# Altium PCB debug.PCBDOC
Units mil, origin at the board's own origin, x right, y up, seen from the top; angles counter-clockwise.
Board outline 3000 x 3000 mil, 4 copper layers (Top Layer, InternalPlane1, Mid-Layer 2, Bottom Layer); 4 components, 52 nets, 130 pads, 2 vias.
Unrouted connection lines stored in the file: 1.
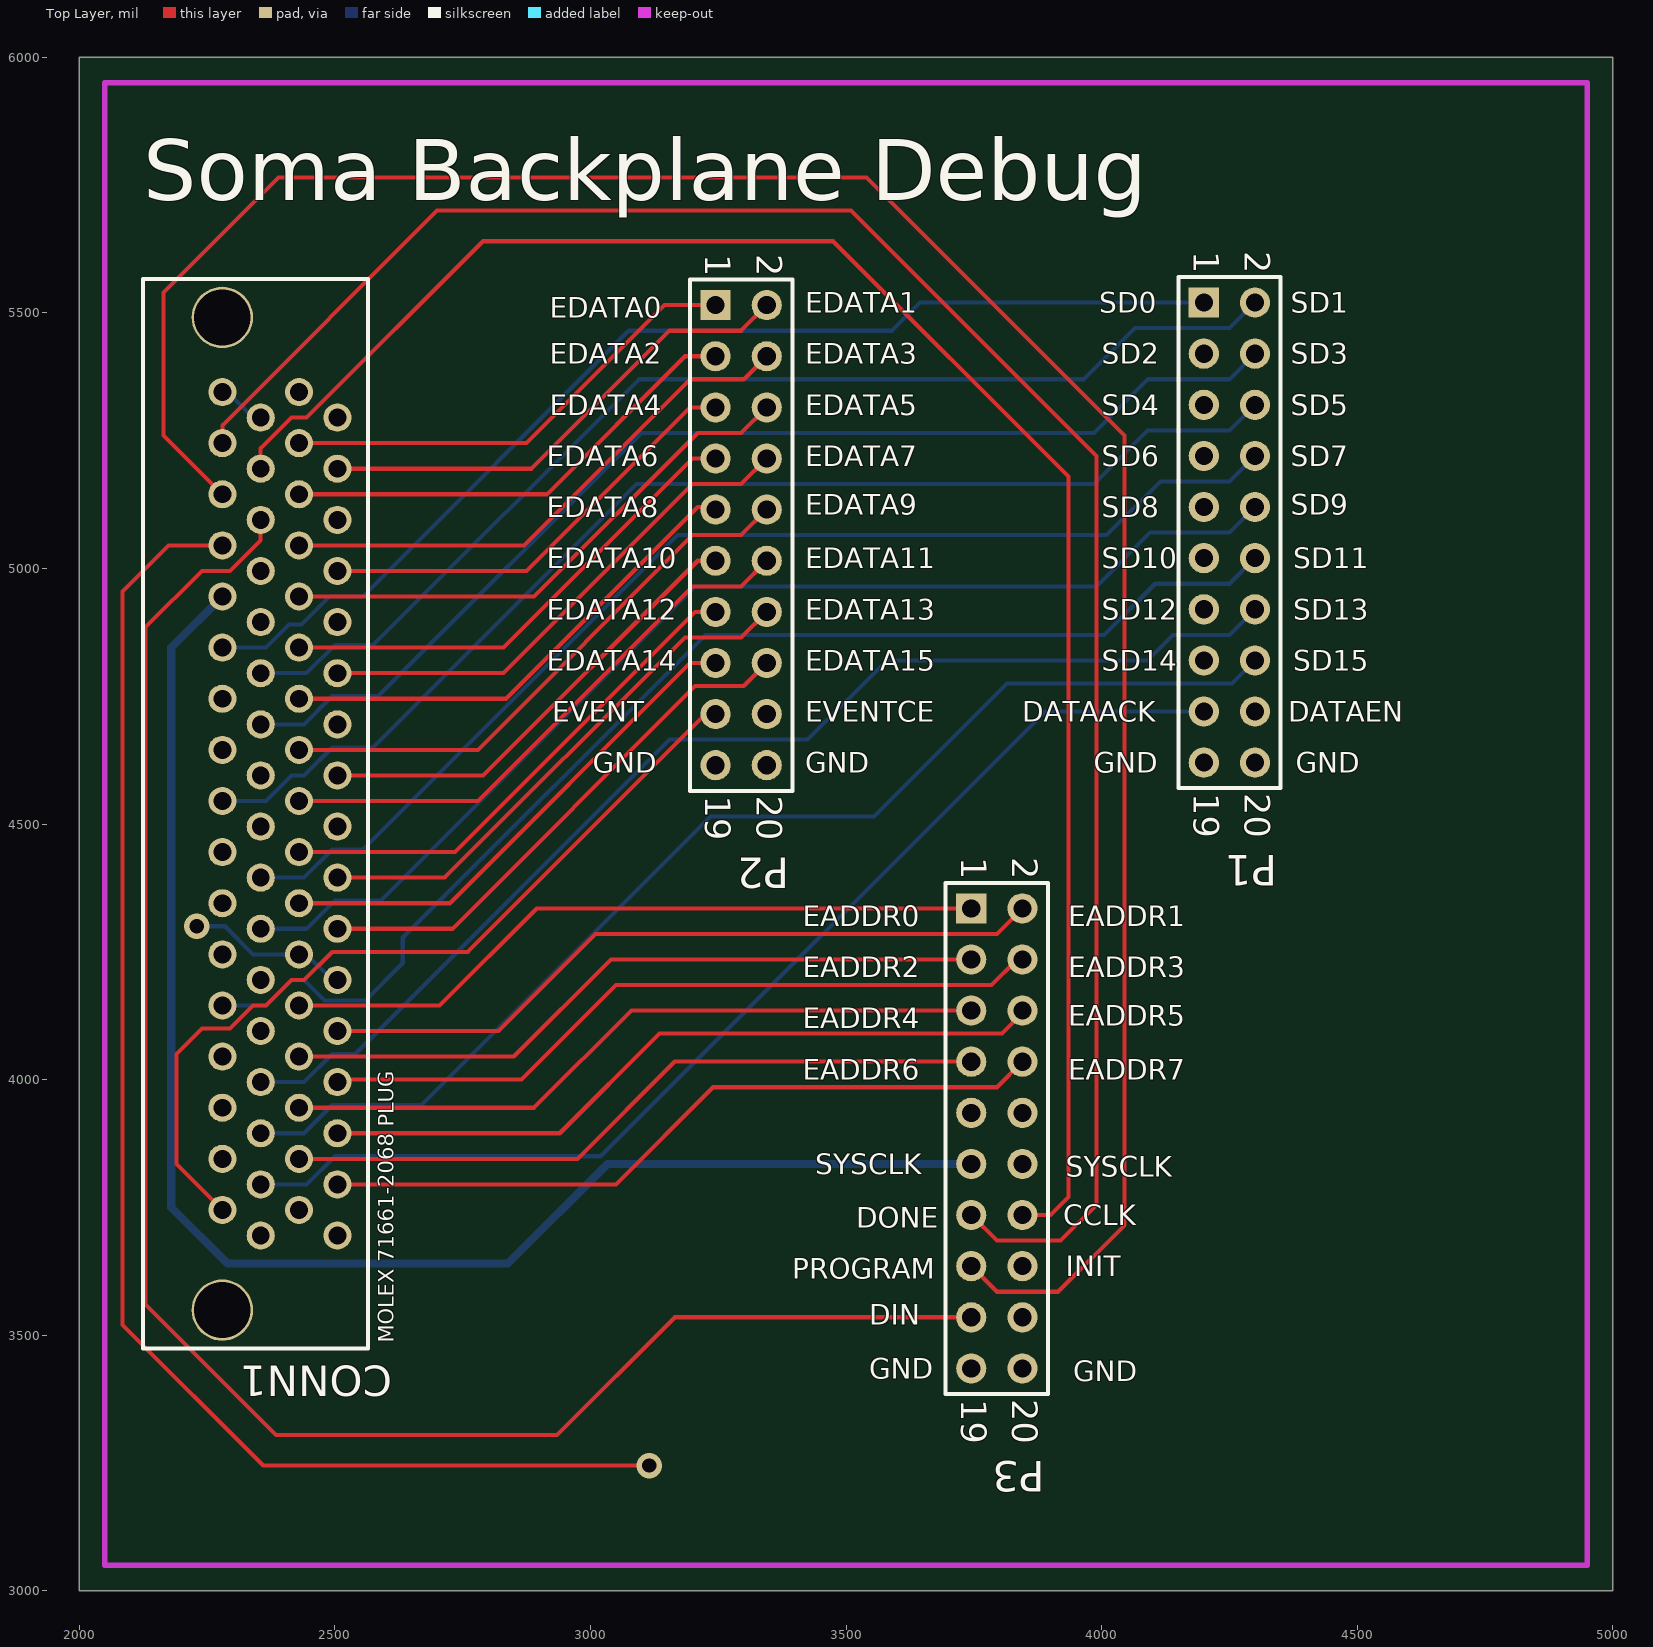
[diagram p0: Top Layer view]
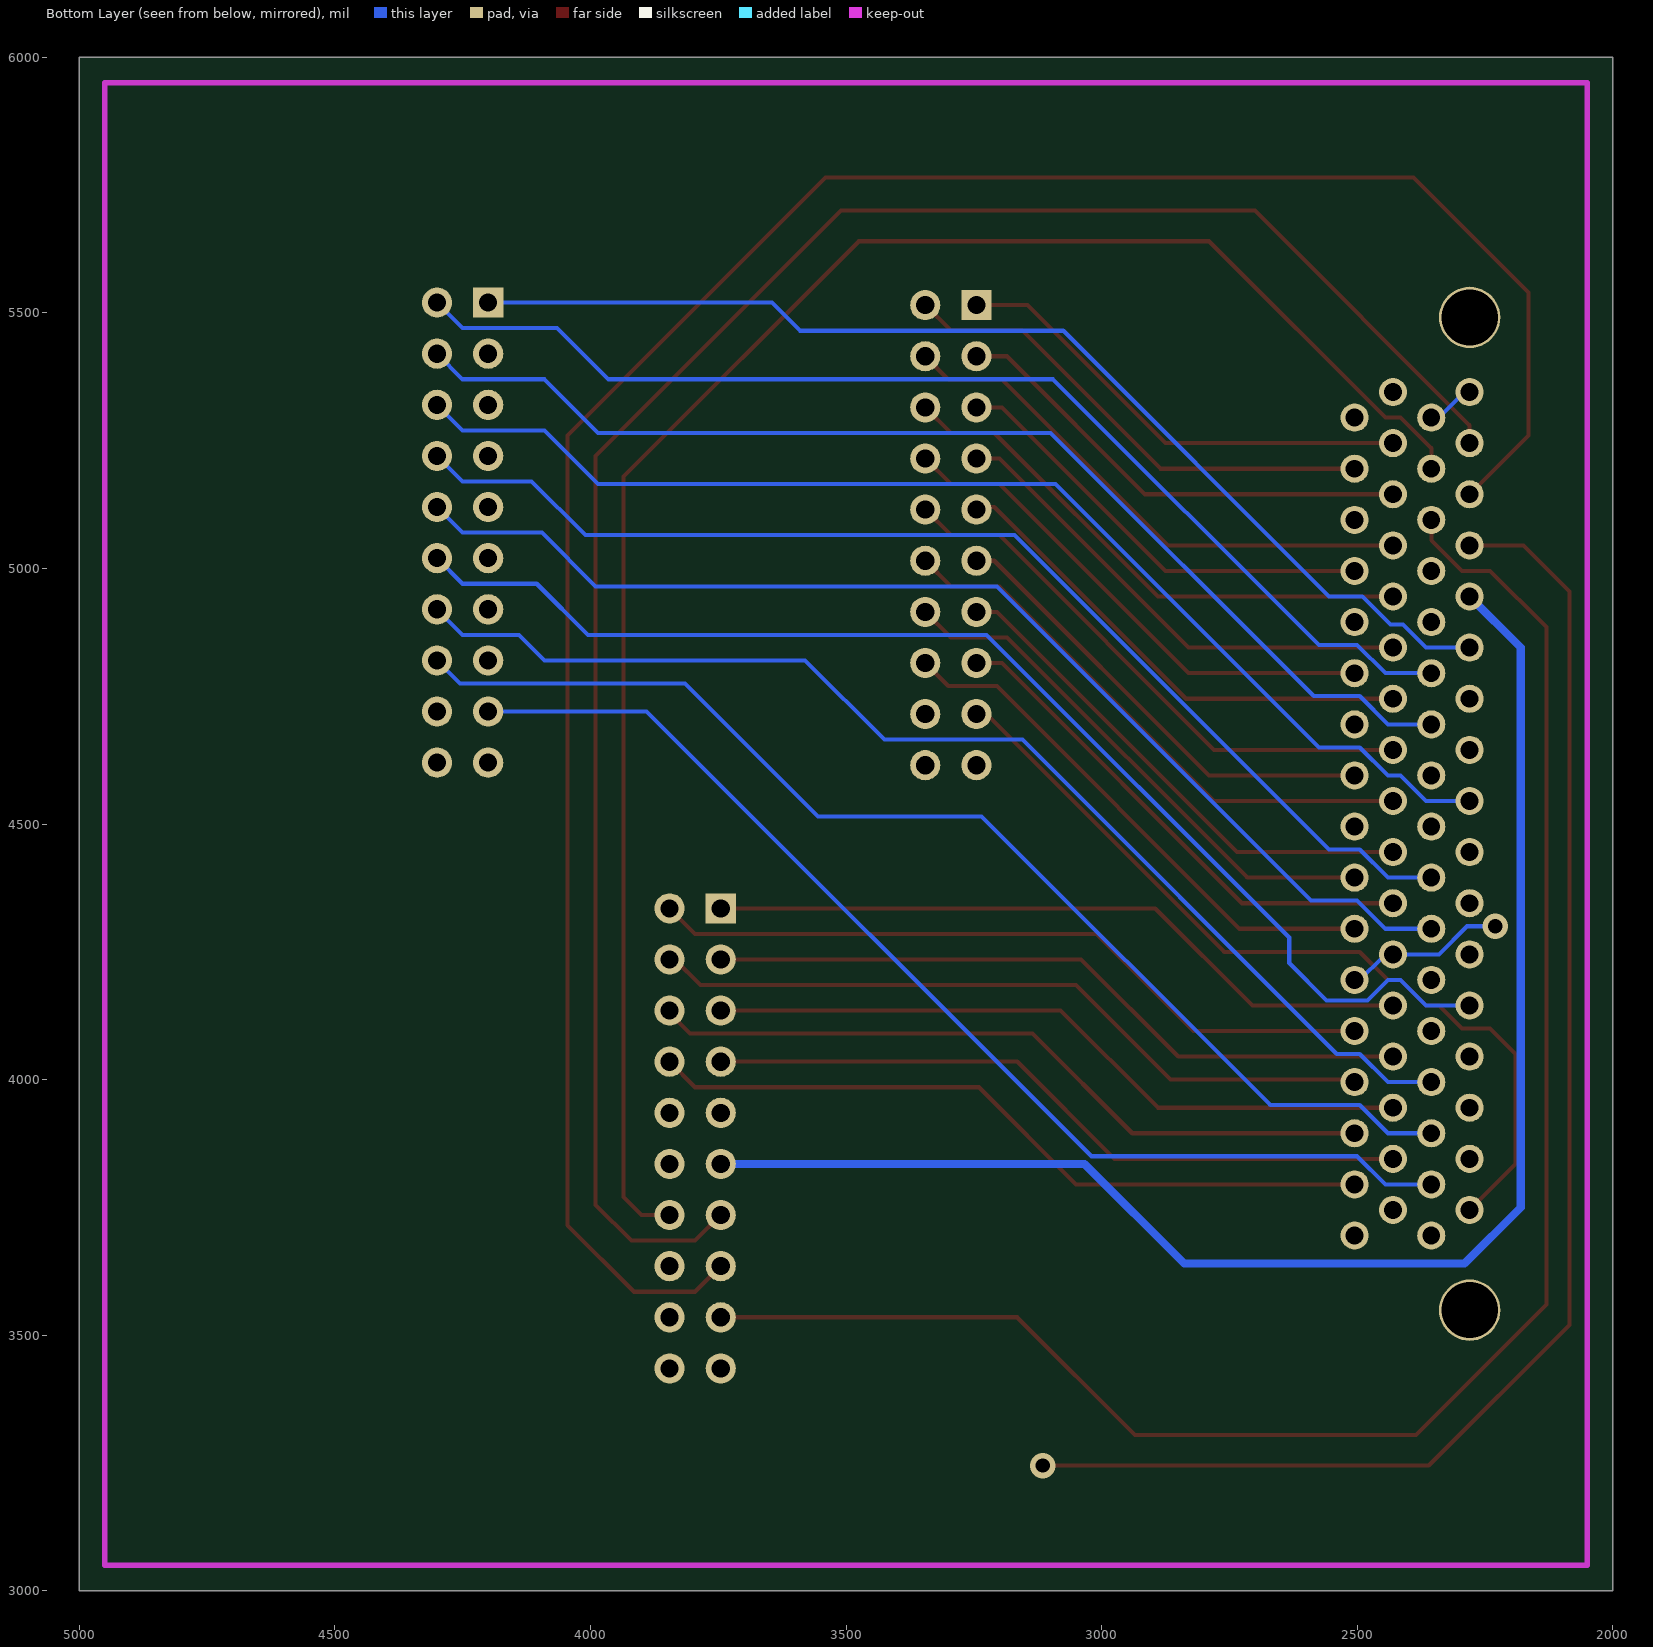
[diagram p1: Bottom Layer view, seen from below]
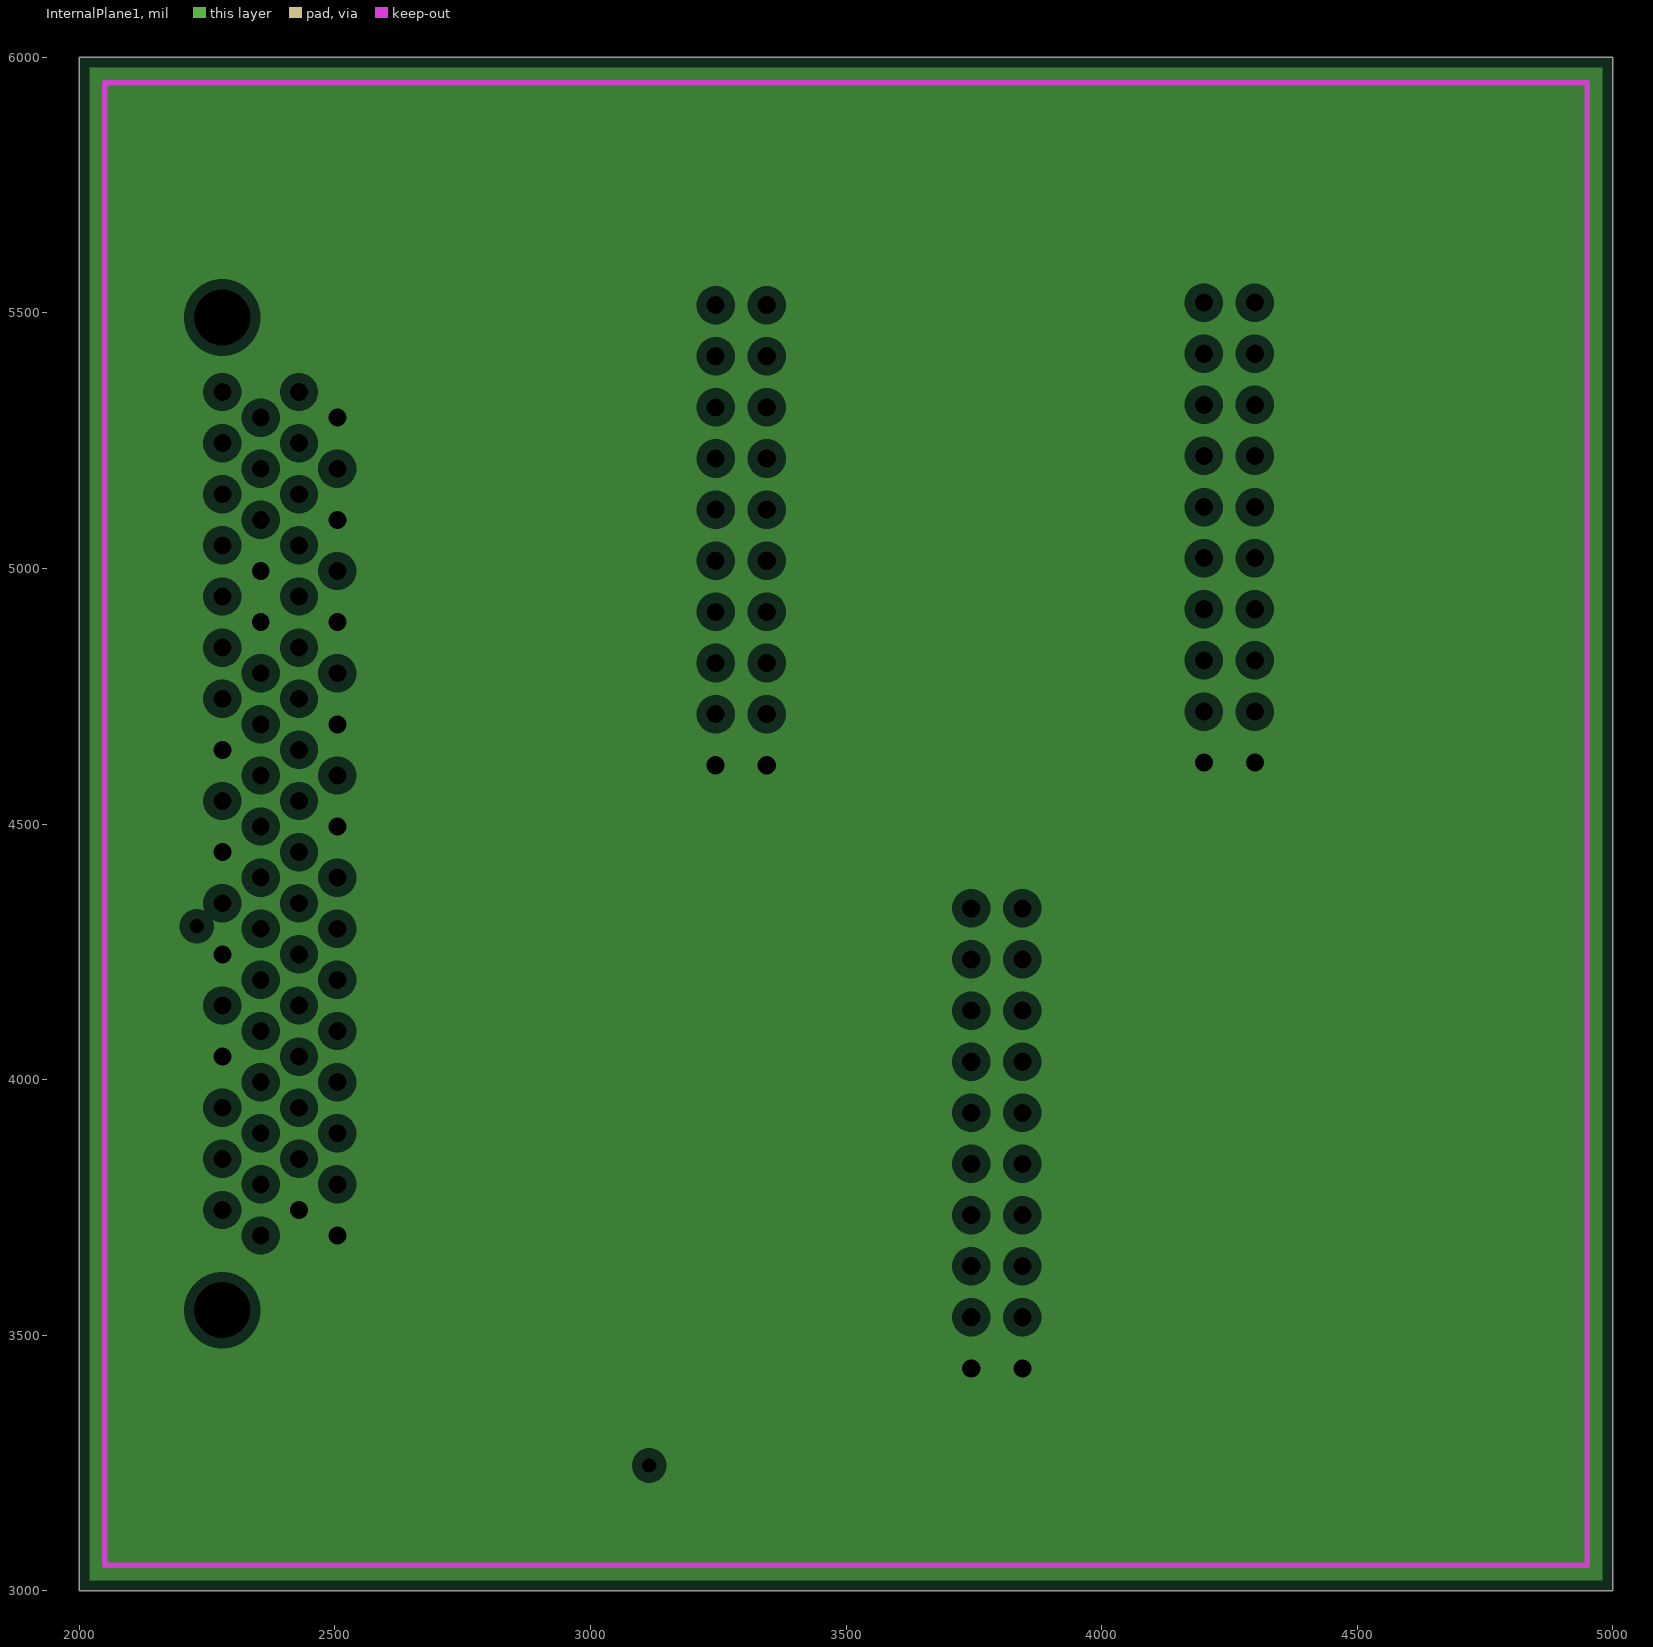
[diagram p2: InternalPlane1, clearances drawn from the general rule]
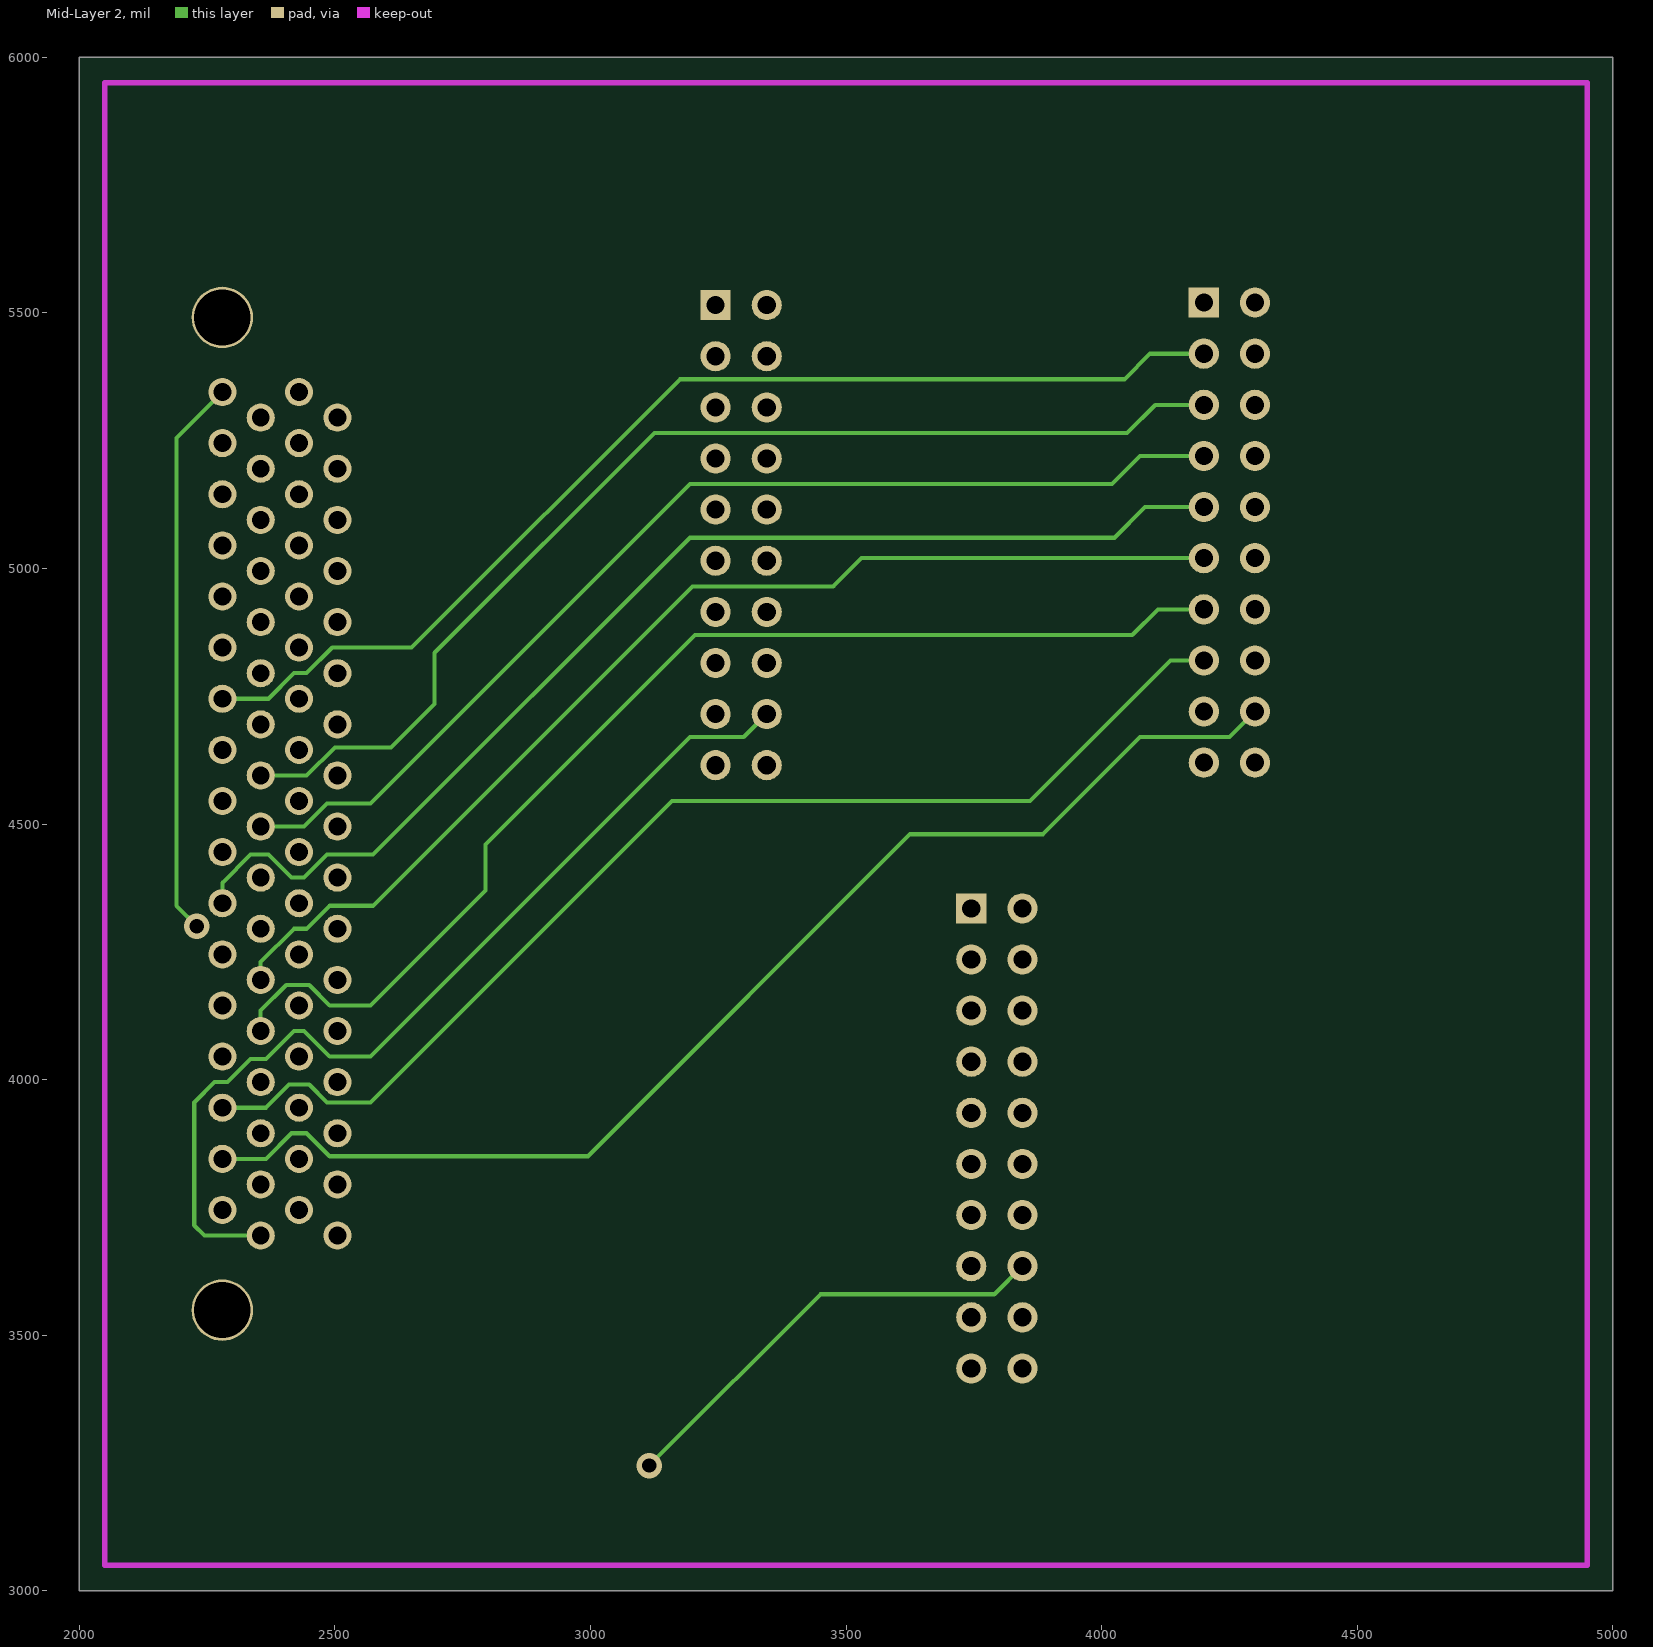
[diagram p3: Mid-Layer 2]

## Layer stack, top to bottom
Top Layer: signal copper 1.4
Dielectric: core 12.6, FR-4, Dk 4.8
InternalPlane1: plane copper 1.4, net GND
Dielectric: prepreg 12.6, FR-4, Dk 4.8
Mid-Layer 2: signal copper 1.4
Dielectric: core 12.6, FR-4, Dk 4.8
Bottom Layer: signal copper 1.4

## Board outline
2000,3000 5000,3000 5000,6000 2000,6000

## Design rules (kind name [scope] priority, off if disabled: settings)
Clearance [All] p1: gap=8
ComponentClearance [All] p1: gap=10 collisioncheckmode=0
HoleSize [All] p1: absolutevalues=TRUE maxlimit=200 minlimit=1 maxpercent=80.000 minpercent=20.000
PlaneClearance [All] p1: clearance=20
PlaneConnect [All] p1: planeconnectstyle=Relief reliefexpansion=20 reliefentries=4 reliefconductorwidth=10 reliefairgap=10
PolygonConnect [All] p1: connectstyle=Relief reliefconductorwidth=10 reliefentries=4 polygonreliefangle="90 Angle"
RoomDefinition debug [InComponentClass('debug')] p1: confinementstyle=ConfineIn formatcopy=TRUE lockcomponents=FALSE outline 2050,3155 4630,3155 4630,5680 2050,5680
RoutingVias [All] p1: holewidth=25 width=40 viastyle="Through Hole" minholewidth=28 minwidth=50 maxholewidth=28 maxwidth=50
SolderMaskExpansion [All] p1: expansion=4
TestPointUsage [All] p1: valid=0 allowmultiple=FALSE
Testpoint [All] p1: side=15 testpointundercomponent=TRUE minsize=40 maxsize=100 preferedsize=60 minholesize=0 maxholesize=40 preferedholesize=32 testpointgrid=1 style=1023 order=1234567890
Width [All] p1: maxlimit=16 minlimit=8 preferedwidth=8 minimp=50.000000 maximp=50.000000 favimp=50.000000
14 further rules are at their usual default settings.

## Components (designator, comment, footprint, x,y, rotation, side; value= is the part's Value field where it differs from the comment)
CONN1 "CON68" "MOLEX 71661-2068" 2505,3695 r270 top
P1 "Header 10X2" HDR2X10 4200,5520 r270 top
P2 "Header 10X2" HDR2X10 3245,5515 r270 top
P3 "Header 10X2" HDR2X10 3745,4335 r270 top

## Footprints (in the part's own frame and the unit in brackets; to place one, negate y for a bottom-side part, rotate by r counter-clockwise, add the part's x,y. Pads: shape width x height; smd on the part's side, far side on the other; paste and mask are expansions set on the pad)
HDR2X10 [mm] "Connector; Header; 10x2 Position"
  rect 1.5x1.5 hole 0.9: 1(0,0)
  round 1.5 hole 0.9: 2(0,2.54) 3(2.54,0) 4(2.54,2.54) 5(5.08,0) 6(5.08,2.54) 7(7.62,0) 8(7.62,2.54) 9(10.16,0) 10(10.16,2.54) 11(12.7,0) 12(12.7,2.54) 13(15.24,0) 14(15.24,2.54) 15(17.78,0) 16(17.78,2.54) 17(20.32,0) 18(20.32,2.54) 19(22.86,0) 20(22.86,2.54)
  silkscreen extent -1.27,-1.27 24.13,3.81
"MOLEX 71661-2068" [mil] "Moles 68-pin EBBI 50 mil right angle plug connector, same as U320 SCSI"
  round 120 hole 110: 0(-1796,-225) 0(146,-225)
  round 55 hole 35: 1(0,0) 2(-50,-75) 3(-100,0) 4(-150,-75) 5(-200,0) 6(-250,-75) 7(-300,0) 8(-350,-75) 9(-400,0) 10(-450,-75) 11(-500,0) 12(-550,-75) 13(-600,0) 14(-650,-75) 15(-700,0) 16(-750,-75) 17(-800,0) 18(-850,-75) 19(-900,0) 20(-950,-75) 21(-1000,0) 22(-1050,-75) 23(-1100,0) 24(-1150,-75) 25(-1200,0) 26(-1250,-75) 27(-1300,0) 28(-1350,-75) 29(-1400,0) 30(-1450,-75) 31(-1500,0) 32(-1550,-75) 33(-1600,0) 34(-1650,-75) 35(0,-150) 36(-50,-225) 37(-100,-150) 38(-150,-225) 39(-200,-150) 40(-250,-225) 41(-300,-150) 42(-350,-225) 43(-400,-150) 44(-450,-225) 45(-500,-150) 46(-550,-225) 47(-600,-150) 48(-650,-225) 49(-700,-150) 50(-750,-225) 51(-800,-150) 52(-850,-225) 53(-900,-150) 54(-950,-225) 55(-1000,-150) 56(-1050,-225) 57(-1100,-150) 58(-1150,-225) 59(-1200,-150) 60(-1250,-225) 61(-1300,-150) 62(-1350,-225) 63(-1400,-150) 64(-1450,-225) 65(-1500,-150) 66(-1550,-225) 67(-1600,-150) 68(-1650,-225)
  silkscreen extent -1871,-380 221,60

## Part data
P1 P2 P3: "Header, 10-Pin, Dual row"

## Via types
v1: diameter 50, hole 28, Top Layer to Bottom Layer, 2 vias

## Nets (pads, with @x,y where several pads share a name; then routed paths per layer and width w, separated by ;. In a path a pad name is that pad's centre, name@x,y a point inside that pad or via, vN(x,y) a via of type N, cw(c..) or ccw(c..) an arc to the next point about the centre after c; other vN are vias at no path point)
CCLK: CONN1.65 P3.14 | length 3492.8
  Top Layer w8: CONN1.65 2355,5235 2415,5295 2445,5295 2790,5640 3475,5640 3935,5180 3935,3770 3900,3735 P3.14
DATAACK: CONN1.37 P1.17 | length 2228.1
  Bottom Layer w8: CONN1.37 2445,3795 2500,3850 3020,3850 3890,4720 P1.17
DATAEN: CONN1.38 P1.18 | length 2419.7
  Mid-Layer 2 w8: CONN1.38 2365,3845 2415,3895 2445,3895 2490,3850 2995,3850 3625,4480 3885,4480 4075,4670 4250,4670 P1.18
DIN: CONN1.63 P3.17 | length 3476.3
  Top Layer w8: CONN1.63 2355,5055 2295,4995 2240,4995 2130,4885 2130,3560 2385,3305 2935,3305 3165,3535 P3.17
DONE: CONN1.66 P3.13 | length 3877.5
  Top Layer w8: CONN1.66 2280,5280 2700,5700 3510,5700 3990,5220 3990,3755 3920,3685 3795,3685 P3.13
EADDR0: CONN1.10 P3.1 | length 1393.7
  Top Layer w8: CONN1.10 2705,4145 2895,4335 P3.1
EADDR1: CONN1.9 P3.2 | length 1439.4
  Top Layer w8: CONN1.9 2820,4095 3010,4285 3795,4285 P3.2
EADDR2: CONN1.8 P3.3 | length 1393.7
  Top Layer w8: CONN1.8 2850,4045 3040,4235 P3.3
EADDR3: CONN1.7 P3.4 | length 1432.3
  Top Layer w8: CONN1.7@2500,4000 2865,4000 3050,4185 3785,4185 P3.4@3835,4235
EADDR4: CONN1.6 P3.5 | length 1393.7
  Top Layer w8: CONN1.6 2890,3945 3080,4135 P3.5
EADDR5: CONN1.5 P3.6 | length 1458.6
  Top Layer w8: CONN1.5 2940,3895 3135,4090 3805,4090 P3.6@3860,4145
EADDR6: CONN1.4 P3.7 | length 1393.7
  Top Layer w8: CONN1.4 2975,3845 3165,4035 P3.7
EADDR7: CONN1.3 P3.8 | length 1439.4
  Top Layer w8: CONN1.3 3050,3795 3240,3985 3795,3985 P3.8
EDATA0: CONN1.32 P2.1 | length 926.8
  Top Layer w8: CONN1.32 2875,5245 3145,5515 P2.1
EDATA1: CONN1.31 P2.2 | length 972.5
  Top Layer w8: CONN1.31 2885,5195 3155,5465 3295,5465 P2.2
EDATA2: CONN1.30 P2.3 | length 926.8
  Top Layer w8: CONN1.30 2915,5145 3185,5415 P2.3
EDATA3: CONN1.28 P2.4 | length 1068.3
  Top Layer w8: CONN1.28 2870,5045 3195,5370 3300,5370 P2.4
EDATA4: CONN1.27 P2.5 | length 872.5
  Top Layer w8: CONN1.27 2875,4995 3195,5315 P2.5
EDATA5: CONN1.26 P2.6 | length 1068.3
  Top Layer w8: CONN1.26 2890,4945 3210,5265 3295,5265 P2.6
EDATA6: CONN1.24 P2.7 | length 968.3
  Top Layer w8: CONN1.24 2830,4845 3200,5215 P2.7
EDATA7: CONN1.23 P2.8 | length 1014
  Top Layer w8: CONN1.23 2830,4795 3200,5165 3295,5165 P2.8
EDATA8: CONN1.22 P2.9 | length 980.3
  Top Layer w8: CONN1.22 2835,4745 3210,5120 P2.9@3255,5120
EDATA9: CONN1.20 P2.10 | length 1109.7
  Top Layer w8: CONN1.20 2780,4645 3200,5065 3295,5065 P2.10
EDATA10: CONN1.19 P2.11 | length 914
  Top Layer w8: CONN1.19 2790,4595 3210,5015 P2.11
EDATA11: CONN1.18 P2.12 | length 1109.7
  Top Layer w8: CONN1.18 2780,4545 3200,4965 3295,4965 P2.12
EDATA12: CONN1.16 P2.13 | length 1009.7
  Top Layer w8: CONN1.16 2735,4445 3205,4915 P2.13
EDATA13: CONN1.15 P2.14 | length 1055.4
  Top Layer w8: CONN1.15 2715,4395 3185,4865 3295,4865 P2.14
EDATA14: CONN1.14 P2.15 | length 994.7
  Top Layer w8: CONN1.14 2725,4345 3195,4815 P2.15@3230,4815
EDATA15: CONN1.13 P2.16 | length 1055.4
  Top Layer w8: CONN1.13 2730,4295 3205,4770 3300,4770 P2.16
EVENT: CONN1.36 P2.17 | length 1672.7
  Top Layer w8: CONN1.36 2190,3835 2190,4050 2240,4100 2295,4100 2340,4145 2365,4145 2415,4195 2440,4195 2495,4250 2760,4250 3225,4715 P2.17
EVENTCE: CONN1.35 P2.18 | length 1854.5
  Mid-Layer 2 w8: CONN1.35 2245,3695 2225,3715 2225,3955 2265,3995 2290,3995 2335,4040 2365,4040 2420,4095 2440,4095 2490,4045 2570,4045 3195,4670 3300,4670 P2.18
GND: CONN1.1 CONN1.2 CONN1.17 CONN1.21 CONN1.25 CONN1.29 CONN1.33 CONN1.42 CONN1.46 CONN1.50 CONN1.54 CONN1.59 CONN1.61 P1.19 P1.20 P2.19 P2.20 P3.19 P3.20
INIT: CONN1.62 P3.16 | length 3702.7
  Top Layer w8: CONN1.62 2175,5045 2085,4955 2085,3520 2360,3245 v1(3115,3245)
  Mid-Layer 2 w8: v1(3115,3245) 3450,3580 3790,3580 P3.16
P\R\O\G\R\A\M\: CONN1.64 P3.15 | length 4544.6
  Top Layer w8: CONN1.64 2165,5260 2165,5540 2390,5765 3540,5765 4045,5260 4045,3715 3915,3585 3795,3585 P3.15
SYSCLK: CONN1.60 P3.11 P3.12 | length 2927.8
  Bottom Layer w16: CONN1.60 2180,4845 2180,3750 2290,3640 2838.28,3640 3033.28,3835 P3.11
SYSDATA0: CONN1.58 P1.1 | length 2199.6
  Bottom Layer w8: CONN1.58 2365,4845 2410,4890 2435,4890 2490,4945 2555,4945 3075,5465 3590,5465 3645,5520 P1.1
SYSDATA1: CONN1.57 P1.2 | length 2245.3
  Bottom Layer w8: CONN1.57 2445,4795 2500,4850 2575,4850 3095,5370 3965,5370 4065,5470 4250,5470 P1.2
SYSDATA2: CONN1.56 P1.3 | length 2199.6
  Mid-Layer 2 w8: CONN1.56 2370,4745 2420,4795 2445,4795 2495,4845 2650,4845 3175,5370 4045,5370 4095,5420 P1.3
SYSDATA3: CONN1.55 P1.4 | length 2245.3
  Bottom Layer w8: CONN1.55 2440,4695 2495,4750 2585,4750 3100,5265 3985,5265 4090,5370 4250,5370 P1.4
SYSDATA4: CONN1.53 P1.5 | length 2203.9
  Mid-Layer 2 w8: CONN1.53 2445,4595 2500,4650 2610,4650 2695,4735 2695,4835 3125,5265 4050,5265 4105,5320 P1.5
SYSDATA5: CONN1.52 P1.6 | length 2341
  Bottom Layer w8: CONN1.52 2365,4545 2415,4595 2440,4595 2495,4650 2575,4650 3090,5165 3985,5165 4090,5270 4250,5270 P1.6
SYSDATA6: CONN1.51 P1.7 | length 2145.3
  Mid-Layer 2 w8: CONN1.51 2440,4495 2485,4540 2570,4540 3195,5165 4020,5165 4075,5220 P1.7
SYSDATA7: CONN1.49 P1.8 | length 2286.7
  Bottom Layer w8: CONN1.49 2440,4395 2495,4450 2555,4450 3170,5065 4010,5065 4115,5170 4250,5170 P1.8
SYSDATA8: CONN1.48 P1.9 | length 2301.7
  Mid-Layer 2 w8: CONN1.48 2280,4385 2335,4440 2370,4440 2415,4395 2440,4395 2485,4440 2575,4440 3195,5060 4025,5060 4085,5120 P1.9
SYSDATA9: CONN1.47 P1.10 | length 2286.7
  Bottom Layer w8: CONN1.47 2445,4295 2500,4350 2590,4350 3205,4965 3990,4965 4095,5070 4250,5070 P1.10
SYSDATA10: CONN1.45 P1.11 | length 2207.2
  Mid-Layer 2 w8: CONN1.45 2355,4230 2420,4295 2445,4295 2490,4340 2575,4340 3200,4965 3475,4965 3530,5020 P1.11
SYSDATA11: CONN1.44 P1.12 | length 2444.9
  Bottom Layer w8: CONN1.44 2365,4145 2415,4195 2440,4195 2480,4155 2560,4155 2632.9,4227.9 2632.9,4277.9 3225,4870 4005,4870 4105,4970 4250,4970 P1.12
SYSDATA12: CONN1.43 P1.13 | length 2296
  Mid-Layer 2 w8: CONN1.43 2355,4135 2405,4185 2450,4185 2490,4145 2570,4145 2795,4370 2795,4460 3205,4870 4060,4870 4110,4920 P1.13
SYSDATA13: CONN1.41 P1.14 | length 2328.1
  Bottom Layer w8: CONN1.41 2440,3995 2495,4050 2540,4050 3155,4665 3425,4665 3580,4820 4090,4820 4140,4870 4250,4870 P1.14
SYSDATA14: CONN1.40 P1.15 | length 2311.4
  Mid-Layer 2 w8: CONN1.40 2365,3945 2410,3990 2450,3990 2485,3955 2570,3955 3160,4545 3860,4545 4135,4820 P1.15
SYSDATA15: CONN1.39 P1.16 | length 2328.1
  Bottom Layer w8: CONN1.39 2440,3895 2495,3950 2670,3950 3235,4515 3555,4515 3815,4775 4255,4775 P1.16
VCC: CONN1.11 CONN1.12 CONN1.67 CONN1.68 | length 1514.3
  Mid-Layer 2 w8: v1(2230,4300) 2190,4340 2190,5255 CONN1.68
  Bottom Layer w8: v1(2230,4300) 2285,4300 2340,4245 2445,4245 CONN1.11@2500,4190 ; CONN1.68@2280,5355 2340,5295 CONN1.67
pads on no net: CONN1.0 CONN1.34 P3.9 P3.10 P3.18

## Polygon pours and split planes (outlines as drawn)
GND on InternalPlane1 (split plane): 2020.02,3020.01 2020.02,5979.98 4979.98,5979.98 4979.98,3020.01

## Keep-outs
Keep-Out Layer:
  lines w10: 2050,3050 2050,5950 4950,5950 4950,3050 2050,3050

## Silkscreen, mask and mechanical layers (free items; w line width, h text height)
Top Overlay:
  text "Soma Backplane Debug" at 2125,5720 h120
  text "EDATA1" at 3420,5500 h40
  text "SD0" at 3995,5500 h40
  text "SD1" at 4370,5500 h40
  text "EDATA0" at 2920,5490 h40
  text "EDATA2" at 2920,5400 h40
  text "EDATA3" at 3420,5400 h40
  text "SD2" at 4000,5400 h40
  text "SD3" at 4370,5400 h40
  text "EDATA4" at 2920,5300 h40
  text "EDATA5" at 3420,5300 h40
  text "SD4" at 4000,5300 h40
  text "SD5" at 4370,5300 h40
  text "EDATA6" at 2915,5200 h40
  text "EDATA7" at 3420,5200 h40
  text "SD6" at 4000,5200 h40
  text "SD7" at 4370,5200 h40
  text "EDATA9" at 3420,5105 h40
  text "SD9" at 4370,5105 h40
  text "EDATA8" at 2915,5100 h40
  text "SD8" at 4000,5100 h40
  text "EDATA10" at 2915,5000 h40
  text "EDATA11" at 3420,5000 h40
  text "SD10" at 4000,5000 h40
  text "SD11" at 4375,5000 h40
  text "EDATA12" at 2915,4900 h40
  text "EDATA13" at 3420,4900 h40
  text "SD12" at 4000,4900 h40
  text "SD13" at 4375,4900 h40
  text "EDATA14" at 2915,4800 h40
  text "EDATA15" at 3420,4800 h40
  text "SD14" at 4000,4800 h40
  text "SD15" at 4375,4800 h40
  text "EVENT" at 2925,4700 h40
  text "EVENTCE" at 3420,4700 h40
  text "DATAACK" at 3845,4700 h40
  text "DATAEN" at 4365,4700 h40
  text "GND" at 3005,4600 h40
  text "GND" at 3420,4600 h40
  text "GND" at 3985,4600 h40
  text "GND" at 4380,4600 h40
  text "EADDR0" at 3415,4300 h40
  text "EADDR1" at 3935,4300 h40
  text "EADDR2" at 3415,4200 h40
  text "EADDR3" at 3935,4200 h40
  text "EADDR5" at 3935,4105 h40
  text "EADDR4" at 3415,4100 h40
  text "EADDR6" at 3415,4000 h40
  text "EADDR7" at 3935,4000 h40
  text "SYSCLK" at 3440,3815 h40
  text "SYSCLK" at 3930,3810 h40
  text "CCLK" at 3925,3715 h40
  text "DONE" at 3520,3710 h40
  text "INIT" at 3930,3615 h40
  text "PROGRAM" at 3395,3610 h40
  text "DIN" at 3545,3520 h40
  text "GND" at 3545,3415 h40
  text "GND" at 3945,3410 h40
Drill Drawing:
  text ".LEGEND" at 5200,3200 h60
  text "Drill Drawing." at 5200,3100 h60

## Dimensions
2050,3050 to 2050,5950 on Mechanical 1
2050,3050 to 4950,3050 on Mechanical 1

## Text inside footprints (layer, text, board x,y; h text height)
CONN1: Top Overlay "MOLEX 71661-2068 PLUG" at 2615,3485 h30 r90
P1: Top Overlay "2" at 4280,5620 h50 r270; Top Overlay "1" at 4180,5620 h50 r270; Top Overlay "19" at 4180,4560 h50 r270; Top Overlay "20" at 4280,4560 h50 r270
P2: Top Overlay "2" at 3325,5615 h50 r270; Top Overlay "1" at 3225,5615 h50 r270; Top Overlay "19" at 3225,4555 h50 r270; Top Overlay "20" at 3325,4555 h50 r270
P3: Top Overlay "2" at 3825,4435 h50 r270; Top Overlay "1" at 3725,4435 h50 r270; Top Overlay "19" at 3725,3375 h50 r270; Top Overlay "20" at 3825,3375 h50 r270